# Altium PCB JHPowerBoardPCBpart2.PcbDoc
Units mm, origin at the board's own origin, x right, y up, seen from the top; angles counter-clockwise.
Board outline 95 x 90 mm, 2 copper layers (Top Layer, Bottom Layer); 10 components, 8 nets, 147 pads, 11 vias.
Unrouted connection lines stored in the file: 3.
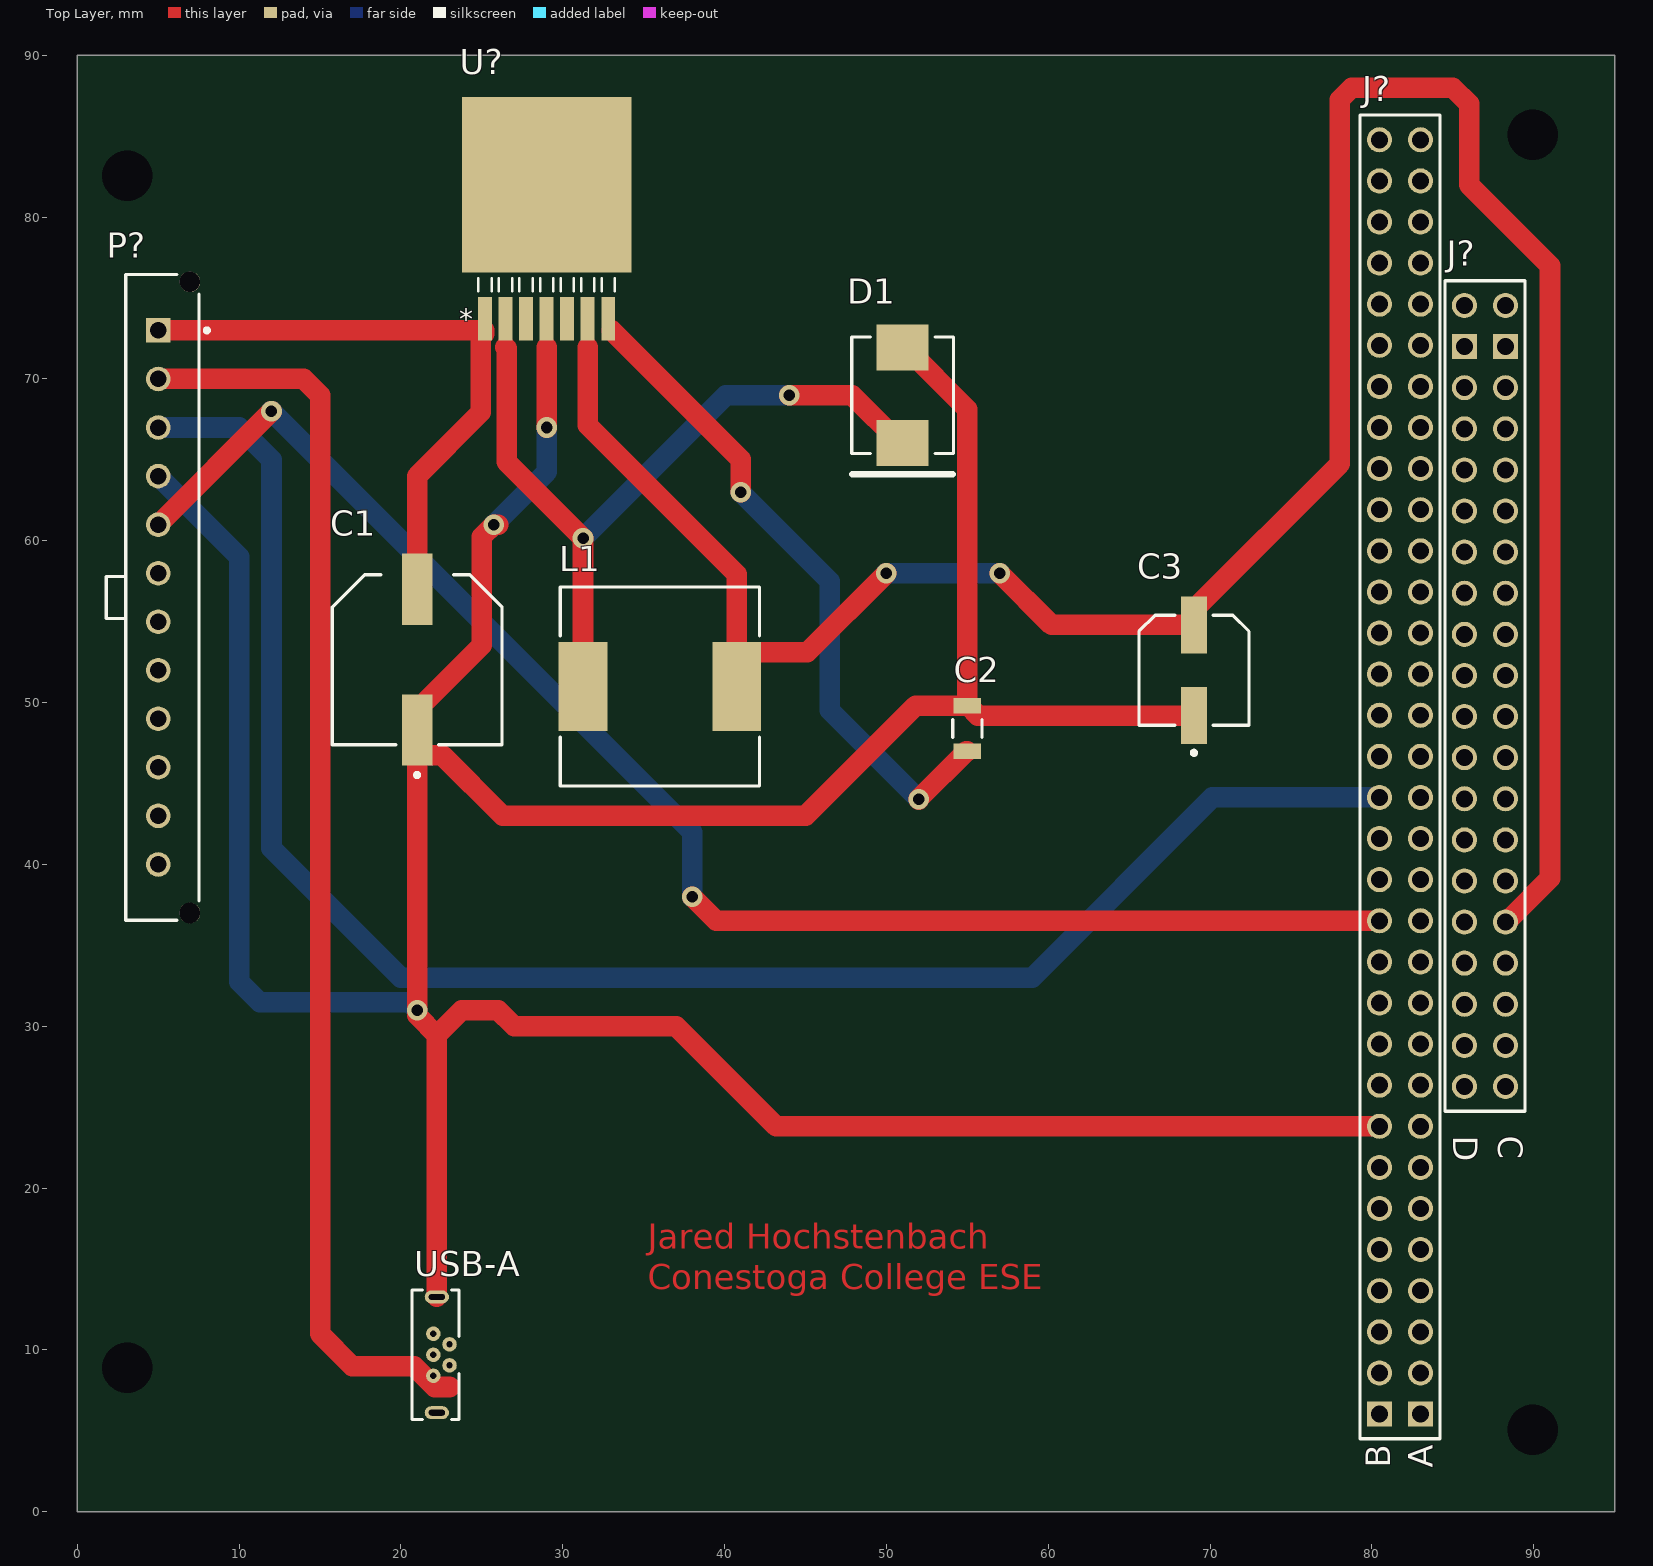
[diagram p0: Top Layer view]
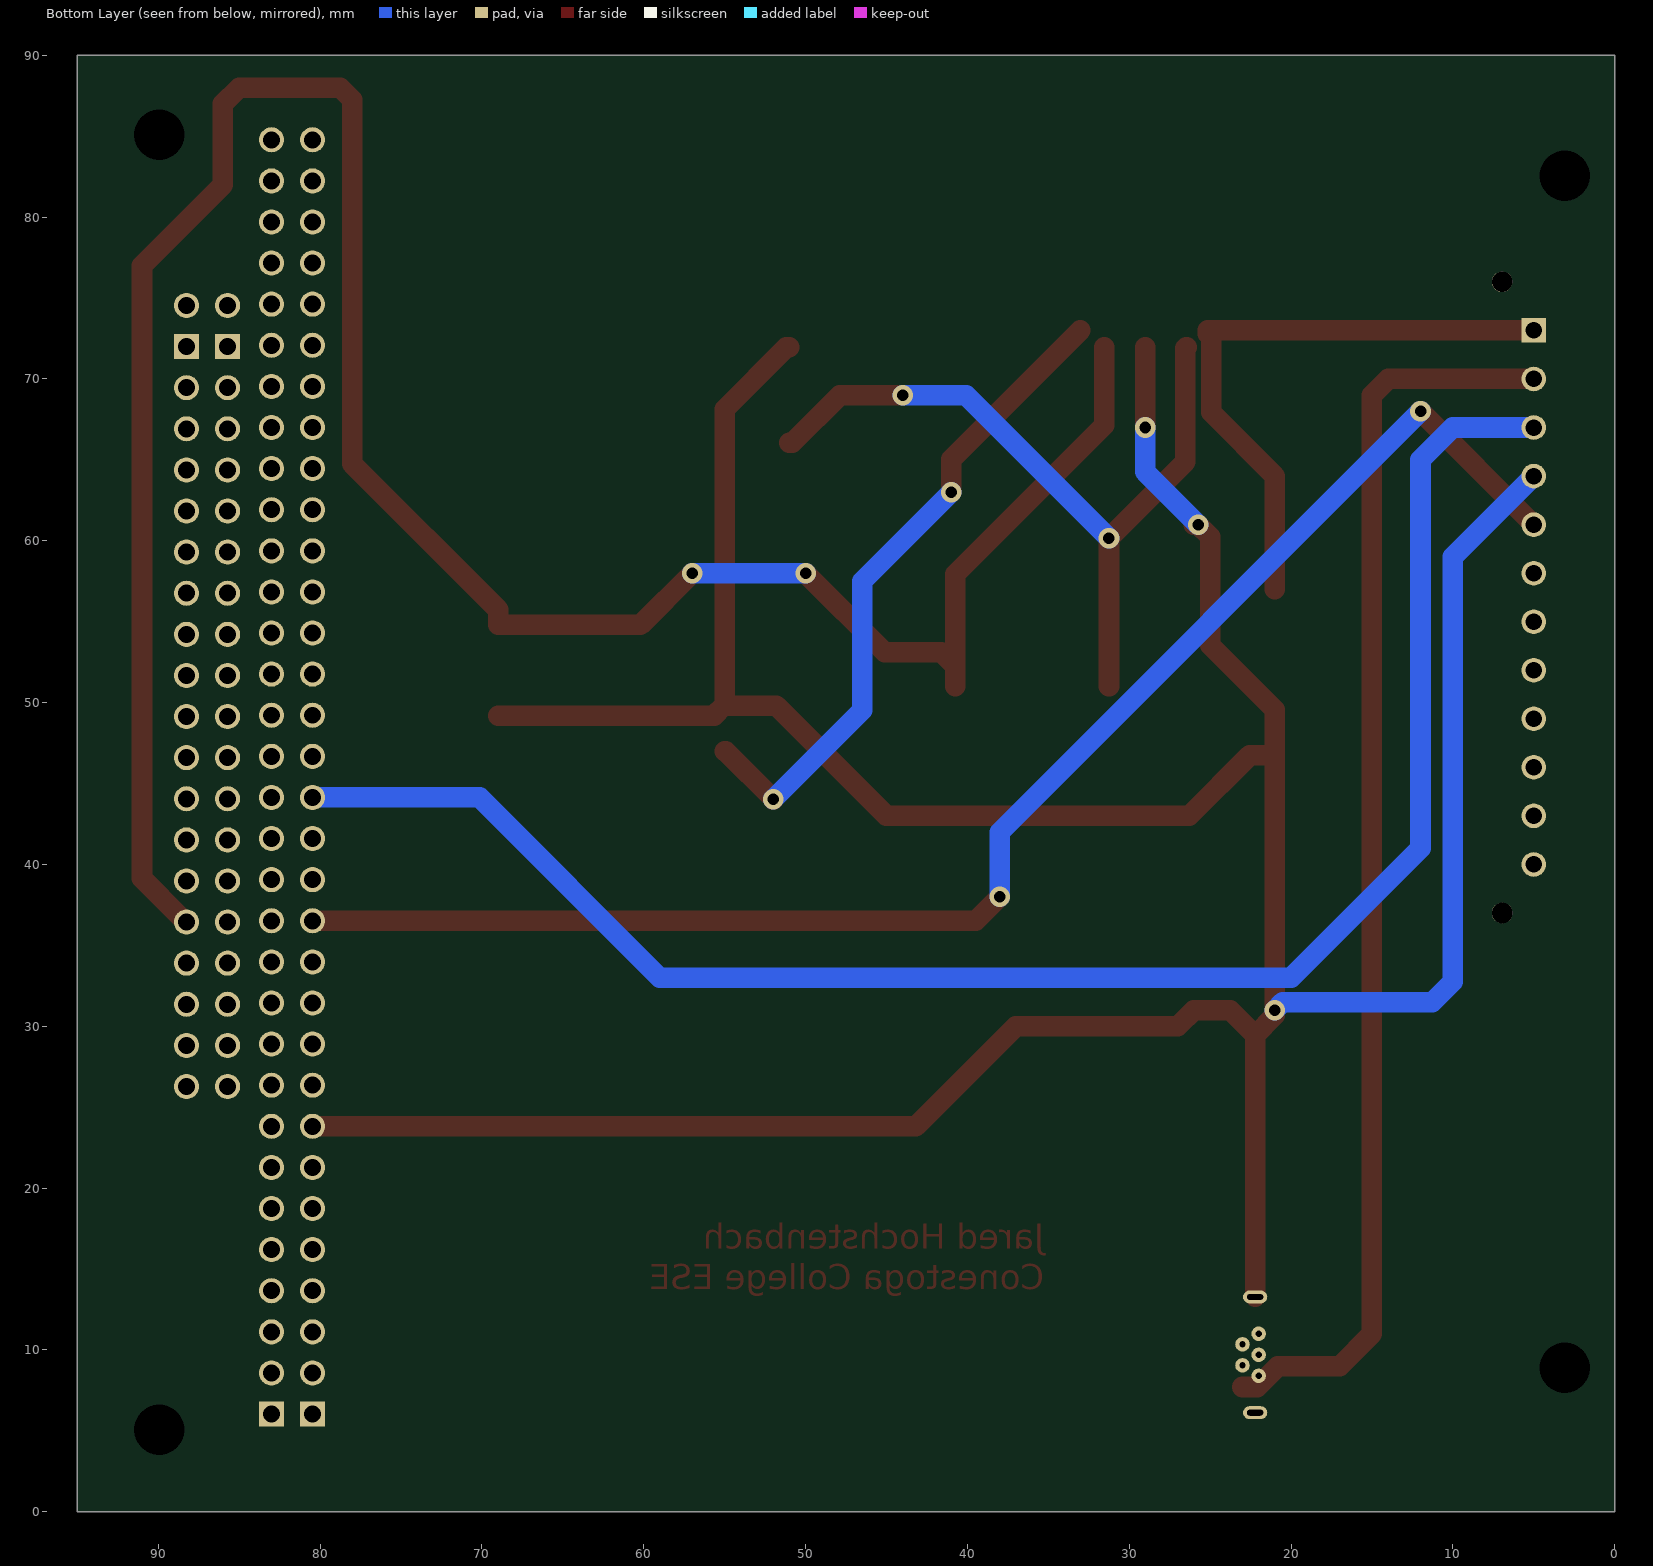
[diagram p1: Bottom Layer view, seen from below]
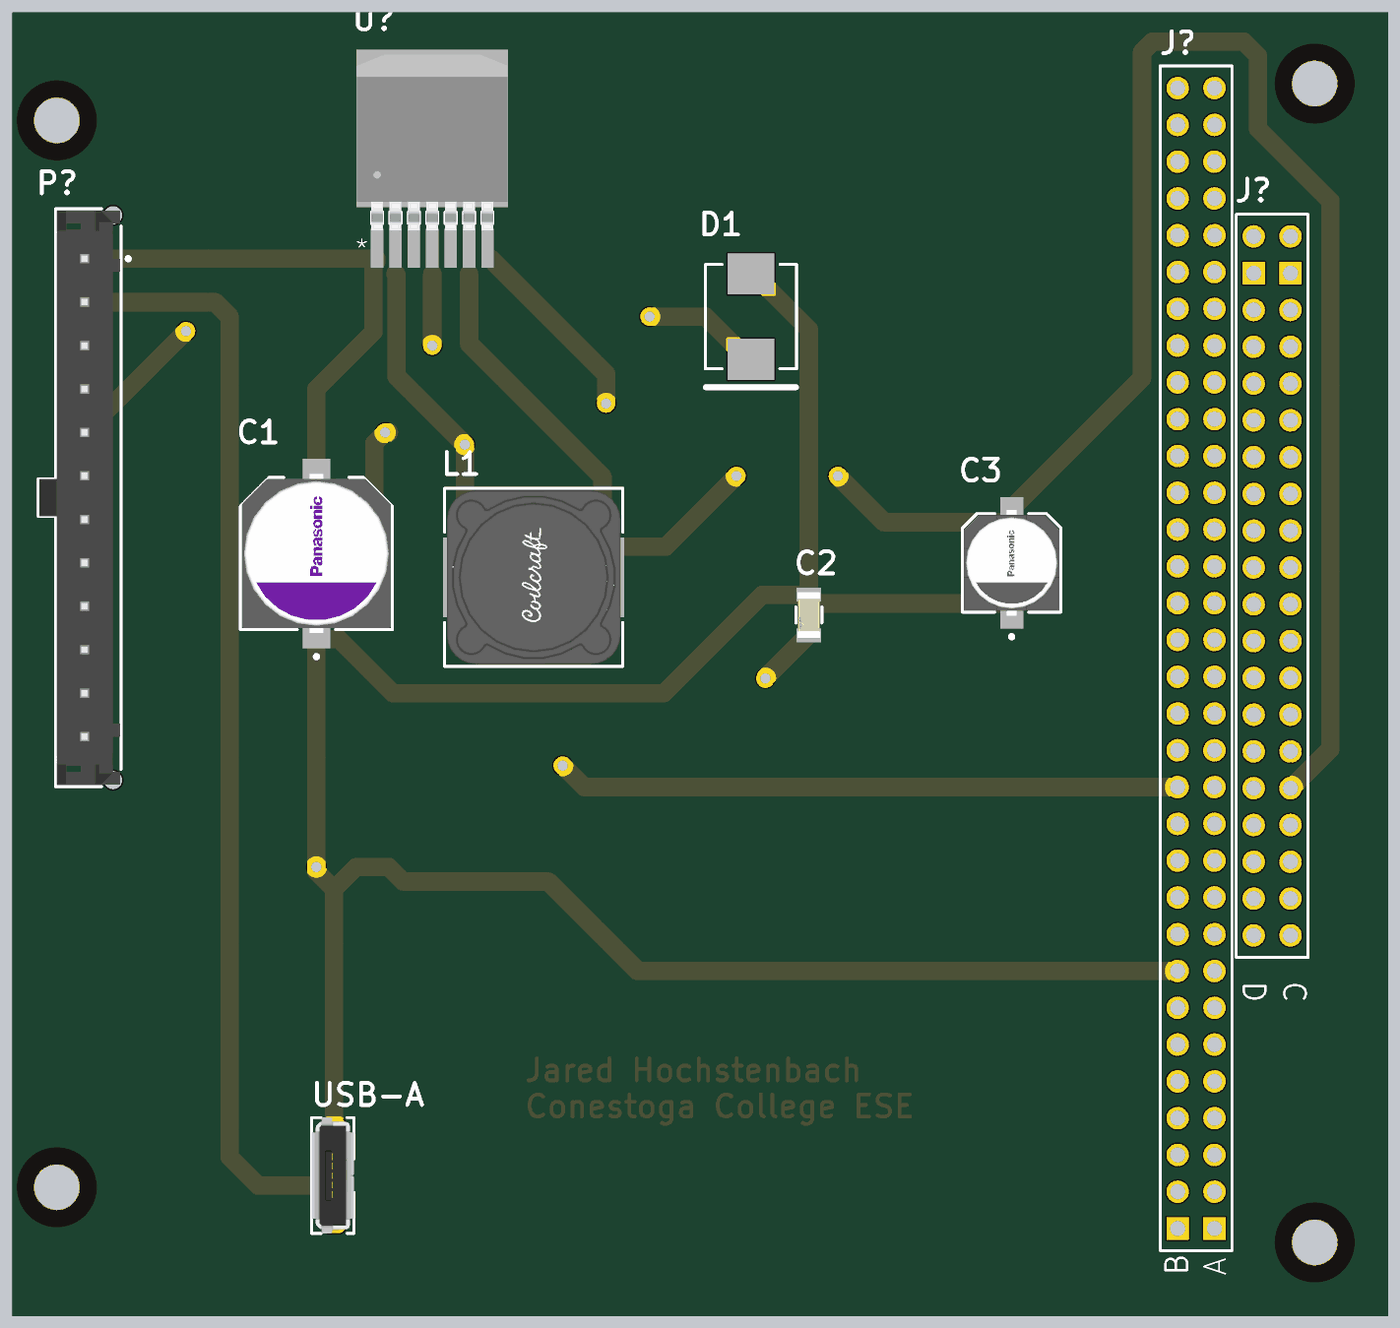
[diagram p2: 3D render of the assembled board from above, using the file's embedded part models]

## Layer stack, top to bottom
Top Solder: solder mask 0.0102, Solder Resist, Dk 3.5
Top Layer: signal copper 0.0356
Dielectric 1: dielectric 0.32, FR-4, Dk 4.8
Bottom Layer: signal copper 0.0356
Bottom Solder: solder mask 0.0102, Solder Resist, Dk 3.5

## Board outline
0,0 95,0 95,90 0,90

## Design rules (kind name [scope] priority, off if disabled: settings)
Clearance [All] p1: gap=0.254 ignorepadtopadclearanceinfootprint=FALSE except(0: Arc-Hole Track-Hole SMDPad-Hole THPad-Hole Via-Hole Fill-Hole Poly-Hole Region-Hole Text-Hole)
PolygonConnect [All] p1: connectstyle=Relief reliefconductorwidth=0.254 reliefentries=4 polygonreliefangle="90 Angle" airgapwidth=0.254
RoomDefinition PowerBoardpart2 [InComponentClass('PowerBoardpart2')] p1: confinementstyle=ConfineIn formatcopy=TRUE lockcomponents=FALSE outline -0.54,-0.46 95,-0.46 95,90 -0.54,90
RoutingVias [All] p1: holewidth=0.711 width=1.27 viastyle="Through Hole" minholewidth=0.711 minwidth=1.27 maxholewidth=0.711 maxwidth=1.27
SolderMaskExpansion [All] p1: expansion=0.102 istentingtop=FALSE
Width [All] p1: maxlimit=1.4 minlimit=1 preferedwidth=1.27 minimp=50.000000 maximp=50.000000 favimp=50.000000
30 further rules are at their usual default settings.

## Classes and differential pairs
component class PowerBoardpart2: C1 C2 C3 D1 J? L1 P? U? USB-A

## Components (designator, comment, footprint, x,y, rotation, side; value= is the part's Value field where it differs from the comment)
C1 "50SVPF68M" FP-OS-CON-SMT-F12-MFG 21,52.65 r90 top
C2 "C1206C821K5GACTU" FP-C1206C-EB-MFG 55,48.4 r90 top value="820 pF"
C3 "6SVPC330M" FP-OS-CON-SMT-C6-MFG 69,52 r90 top
D1 "B560C-13-F" DIOD-B5X0C-2_M 51,69 r90 top (schematic designator D?)
J? "PC104-CN-2P-F-R64" BTB2-54-V64F-04 83,6.04 r90 top
J? "PC104-CN-2P-F-R40-NS" BTB2-54-V40F-03 88.25,72 r270 top
L1 "MSS1210-333MEB" FP-MSS1210-333MEB-MFG 36,51 r0 top
P? "66201211122" 66201211122 5.255,56.5 r90 top
U? "LM2599SX-3.3/NOPB" TS7B 29,82 r0 top
USB-A "614105150621" 614105150621 22.22,9.7 r90 top

## Footprints (in the part's own frame and the unit in brackets; to place one, negate y for a bottom-side part, rotate by r counter-clockwise, add the part's x,y. Pads: shape width x height; smd on the part's side, far side on the other; paste and mask are expansions set on the pad)
66201211122 [mm] "3.00mm Male Single Row Vertical Header, 12p"
  rect 1.52x1.52 hole 1.02: 1(16.5,0.255)
  round 1.52 hole 1.02: 2(13.5,0.255) 3(10.5,0.255) 4(7.5,0.255) 5(4.5,0.255) 6(1.5,0.255) 7(-1.5,0.255) 8(-4.5,0.255) 9(-7.5,0.255) 10(-10.5,0.255) 11(-13.5,0.255) 12(-16.5,0.255)
  round 1.27 hole 1.27 unplated: MH1(-19.5,-1.705) MH2(19.5,-1.705)
  silkscreen extent -19.95,-2.88 19.95,3.46, body extent -19.82,-2.19 19.83,3.38, height 9.93
614105150621 [mm] "Micro USB 2.0 Type AB Vertical 5 Contacts"
  round 0.9 hole 0.4: 1(-1.3,0.22) 2(-0.65,-0.78) 3(0,0.22) 4(0.65,-0.78) 5(1.3,0.22)
  oval 0.8x1.5 hole 0.35 slot 1 at 90 deg: Shell(-3.575,0) Shell(3.575,0)
  silkscreen extent -4,-1.36 4,1.54, body extent -4,-1.36 4,1.54, height 5.66
BTB2-54-V40F-03 [mm] "Board-to-Board Connector, PC104 CD ISA, Vertical, 2-Row, 40-Postion, Pitch 2.54mm, Receptacle"
  round 1.55 hole 1.05: C0(-2.54,0) C2(2.54,0) C3(5.08,0) C4(7.62,0) C5(10.16,0) C6(12.7,0) C7(15.24,0) C8(17.78,0) C9(20.32,0) C10(22.86,0) C11(25.4,0) C12(27.94,0) C13(30.48,0) C14(33.02,0) C15(35.56,0) C16(38.1,0) C17(40.64,0) C18(43.18,0) C19(45.72,0) D0(-2.54,-2.54) D2(2.54,-2.54) D3(5.08,-2.54) D4(7.62,-2.54) D5(10.16,-2.54) D6(12.7,-2.54) D7(15.24,-2.54) D8(17.78,-2.54) D9(20.32,-2.54) D10(22.86,-2.54) D11(25.4,-2.54) D12(27.94,-2.54) D13(30.48,-2.54) D14(33.02,-2.54) D15(35.56,-2.54) D16(38.1,-2.54) D17(40.64,-2.54) D18(43.18,-2.54) D19(45.72,-2.54)
  rect 1.55x1.55 hole 1.05: C1(0,0) D1(0,-2.54)
  silkscreen extent -4.07,-3.74 47.24,1.21, body extent -4.14,-3.74 47.32,1.21, height 11.05
BTB2-54-V64F-04 [mm] "Board-to-Board Connector, PC104 BA ISA, Stackthrough, Vertical, 2-Row, 64-Postion, Pitch 2.54mm,  Receptacle , Height 11.05mm"
  rect 1.55x1.55 hole 1.05: A1(0,0) B1(0,2.54)
  round 1.55 hole 1.05: A2(2.54,0) A3(5.08,0) A4(7.62,0) A5(10.16,0) A6(12.7,0) A7(15.24,0) A8(17.78,0) A9(20.32,0) A10(22.86,0) A11(25.4,0) A12(27.94,0) A13(30.48,0) A14(33.02,0) A15(35.56,0) A16(38.1,0) A17(40.64,0) A18(43.18,0) A19(45.72,0) A20(48.26,0) A21(50.8,0) A22(53.34,0) A23(55.88,0) A24(58.42,0) A25(60.96,0) A26(63.5,0) A27(66.04,0) A28(68.58,0) A29(71.12,0) A30(73.66,0) A31(76.2,0) A32(78.74,0) B2(2.54,2.54) B3(5.08,2.54) B4(7.62,2.54) B5(10.16,2.54) B6(12.7,2.54) B7(15.24,2.54) B8(17.78,2.54) B9(20.32,2.54) B10(22.86,2.54) B11(25.4,2.54) B12(27.94,2.54) B13(30.48,2.54) B14(33.02,2.54) B15(35.56,2.54) B16(38.1,2.54) B17(40.64,2.54) B18(43.18,2.54) B19(45.72,2.54) B20(48.26,2.54) B21(50.8,2.54) B22(53.34,2.54) B23(55.88,2.54) B24(58.42,2.54) B25(60.96,2.54) B26(63.5,2.54) B27(66.04,2.54) B28(68.58,2.54) B29(71.12,2.54) B30(73.66,2.54) B31(76.2,2.54) B32(78.74,2.54)
  silkscreen extent -1.52,-1.2 80.27,3.75, body extent -1.6,-1.2 80.34,3.75, height 11.05
DIOD-B5X0C-2_M [mm] "Molded Diode, 2-Leads, Body 7.11x6.22mm, IPC Low Density"
  rect 2.85x3.2 smd: 1(-2.95,0) 2(2.95,0)
  silkscreen extent -4.87,-3.15 3.6,3.15, body extent -3.56,-3.11 3.55,3.11, height 2.63
FP-C1206C-EB-MFG [mm]
  rect 0.95x1.7 smd paste+0 mask+0: 1(-1.4,0) 2(1.4,0)
  silkscreen extent -0.55,-0.9 0.55,0.9, body extent -2,-1 2,1, height 0.25
FP-MSS1210-333MEB-MFG [mm]
  rect 3x5.5 smd paste+0 mask+0: 1(-4.75,0) 2(4.75,0)
  silkscreen extent -6.15,-6.15 6.15,6.15, body extent -6.35,-6.25 6.35,6.25, height 0.25
FP-OS-CON-SMT-C6-MFG [mm]
  rect 3.5x1.6 smd paste+0 mask+0: 1(-2.8,0) 2(2.8,0)
  silkscreen extent -5.22,-3.4 3.4,3.4, body extent -4.8,-3.65 4.8,3.65, height 0.25
FP-OS-CON-SMT-F12-MFG [mm]
  rect 4.4x1.9 smd paste+0 mask+0: 1(-4.35,0) 2(4.35,0)
  silkscreen extent -7.25,-5.25 5.25,5.25, body extent -6.8,-5.5 6.8,5.5, height 0.25
TS7B [mil]
  rect 33.97x105.56 smd paste+0 mask+0: 1(-150,-326) 2(-100,-326) 3(-50,-326) 4(0,-326) 5(50,-326) 6(100,-326) 7(150,-326)
  rect 412x428 smd paste+0 mask+0: 8(0,0)
  silkscreen extent -166,-259 166,-227, body extent -205,-278 205,200, height 189

## Part data
C1: library part CMP-05428-000631-1, "Conductive Polymer Aluminum Solid Capacitors (OS-CON) 68uF ±20% 50V RADIAL SMT 10x12.6mm", Capacitance=68uF, Case/Package=Radial, ESR (Equivalent Series Resistance)=20mR, Leakage Current=680uA, Max Operating Temperature=105°C, Min Operating Temperature=-55°C, Package Quantity=400, Ripple Current=4.3A, Tolerance=20%, Voltage=50V, Construction=Cylindrical, Diameter=10mm, Dissipation Factor=12%, Height=12.6mm, Height - Seated (Max)=0.5inch, Lead Free="Lead Free", Length=12.6mm, Life (Hours)=5000Hour, Mount="Surface Mount", Number of Pins=12, Packaging="Tape and Reel", Polarity=Polar, REACH SVHC="No SVHC", Ripple Current (AC)=4.3A, RoHS Compliant=Yes, Series="OS-CON™, SVPF", Termination=SMD/SMT, Voltage Rating=50V, Voltage Rating (DC)=50V
C2: library part CMP-03020-020553-1, "CAP CER 820PF 50V C0G/NP0 1206", Capacitance="820 pF", Manufacturer=KEMET, Package=C1206C-EB, Temperature="-55°C to +150°C", Temperature Characteristic=C0G, Temperature Coefficient=15%, Temperature Range High=+150°C, Temperature Range Low=-55°C, Tolerance=0.1, Voltage Rating="50 V", Automotive=Yes, Automotive Grade="Grade 0", Category=Cap, ComponentLink2Description=Datasheet, ComponentLink2URL=https://content.kemet.com/datasheets/KEM_C1007_X8R_ULTRA_150C_SMD.pdf, Device Class L1="Passive Components", Device Class L2=Capacitors, Device Class L3="Ceramic Capacitors", Digikey Description="CAP CER 820PF 50V C0G/NP0 1206", Height=0.88mm, Ipc Land Pattern Name=CAPC320160X78, Lead Free=Yes, Manufacturer Part Number=C1206C821K5GACTU, Material=Ceramic, Mouser Description="Multilayer Ceramic Capacitors MLCC - SMD/SMT 50volts 820pF C0G 10%", Octopart=https://octopart.com/c1206c821k5gactu-kemet-125661, RoHS=TRUE
C3: library part CMP-05428-000913-1, "Conductive Polymer Aluminum Solid Capacitors (OS-CON) 330uF ±20% 6.3V", Capacitance=330uF, Case/Package=Radial, ESR (Equivalent Series Resistance)=17mR, Leakage Current=415uA, Max Operating Temperature=105°C, Min Operating Temperature=-55°C, Package Quantity=1000, Ripple Current=3.39A, Tolerance=20%, Voltage=6.3V, Construction=Cylindrical, Diameter=6.3mm, Dissipation Factor=12%, Height=5.9mm, Height - Seated (Max)=0.236inch, Lead Free="Lead Free", Length=5.9mm, Life (Hours)=2000Hour, Mount="Surface Mount", Number of Pins=6, Packaging="Tape and Reel", Polarity=Polar, Radiation Hardening=No, REACH SVHC="No SVHC", Ripple Current (AC)=3.39A, RoHS Compliant=Yes, Series="OS-CON™, SVPC", Termination=SMD/SMT, Voltage Rating=6.3V, Voltage Rating (DC)=6.3V
D1: library part CMP-2000-05098-2, "Schottky Barrier Rectifier, 5 A, 60 V, -55 to 125 degC, 2-Pin SMD, RoHS, Tape and Reel", If - Forward Current=5A, Ifsm - Forward Surge Current=100A, Ir - Reverse Current=500uA, Manufacturer=DiodesIncorporated, Maximum Operating Temperature=+125C, Minimum Operating Temperature=-55C, Operating Temperature Range=-55Cto+125C, Package / Case=SMC, Vf - Forward Voltage=0.7V, Vrrm - Repetitive Reverse Voltage=60V, Brand=DiodesIncorporated, Configuration=Single, Datasheet URL=https://datasheet.ciiva.com/27052/1538961-27052355.pdf, Datasheet Version="Rev. 7-2, 06/2007", Factory Pack Quantity=3000, Height=2.5mm, Length=7.11mm, Manufacturer URL=http://www.diodes.com/, Mounting Style=SMD/SMT, Packaging=Reel, Product=SchottkyDiodes, Product Category=SchottkyDiodes&Rectifiers, RoHS=True, Series=B560, Technology=Si, Termination Style=SMD/SMT, Type=SchottkyBarrierRectifier, Unit Weight=0.007408oz, Width=6.22mm
J?: library part CMP-0001-00110-1, "Board-to-Board Connector, PC104 BA ISA, Stackthrough, Vertical, 2-Row, 64-Postion, Pitch 2.54mm,  Receptacle, Height 11.05mm", Package Reference=BTB2-54-V64F-04, ClassName="Board Template Connector", Mating Connector="Harwin-M20-6103205 (stackthrough)", Publisher=Altium
J?: library part CMP-0001-00108-1, "Board-to-Board Connector,  PC104 CD ISA, Vertical, 2-Row, 40-Postion, Pitch 2.54mm, Receptacle", Package Reference=BTB2-54-V40F-03, ClassName="Board Template Connector", Mating Connector="Harwin-M20-6112005 (Non-stackthrough)", Publisher=Altium
L1: library part CMP-11268-000051-1, "Fixed Inductor MSS1210 AEC-Q200 33 uH 20 % 5.9 A", DC Resistance (DCR)=39mR, Inductance=33uH, Inductance Tolerance=20%, Max DC Current=5.9A, Max Operating Temperature=85°C, Min Operating Temperature=-40°C, Package Quantity=25, Saturation Current=5.4A, Self Resonant Frequency=7.5MHz, Test Frequency=100kHz, Core Material=Ferrite, Height=10.2mm, Lead Free="Contains Lead", Length=12.3mm, Mount="Surface Mount", Packaging="Tape and Reel", REACH SVHC="No SVHC", RMS Current (Irms)=5.9A, Shielding=Shielded, Termination=SMD/SMT, Tolerance=20%, Width=12.3mm
P?: library part CMP-1502-00450-1, "THT Male Header WR-MPC3, Vertical, Single Row, pitch 3 mm, 12 pins", Contact Resistance=10mOhm, Manufacturer="Wurth Elektronik", Operating Temperature=-40to105degC, Working Voltage=250VAC, Datasheet URL=https://katalog.we-online.de/em/datasheet/6620xx11122.pdf, Gender=Male, Manufacturer URL=http://www.we-online.de, Mounting Technology=THT, Orientation=Vertical, Package Reference=66201211122, Packaging=Tube, Part Number=66201211122, Pin Number=12, Pitch=3mm, Publisher=WurthElektronik
U?: "No Description Available", Mfr_Name="Texas Instruments", Copyright="Copyright (C) 2023 Ultra Librarian. All rights reserved.", Manufacturer_Part_Number=LM2599SX-3.3/NOPB, RefDes=RefDes, Type=DEV
USB-A: library part CMP-1502-03251-1, "Micro USB 2.0 Type AB Receptacle WR-COM, Vertical, THT", Contact Resistance=30mOhm, Manufacturer="Wurth Elektronik", Operating Temperature=-40to85degC, Rated Current=1.8A, Working Voltage=30VAC, Connector Type=MicroUSB2.0TypeAB, Datasheet URL=https://katalog.we-online.de/em/datasheet/614105150621.pdf, Gender=Receptacle, Manufacturer URL=http://www.we-online.de, Mounting Technology=THT, Orientation=Vertical, Package Reference=614105150621, Packaging=TapeandReel, Part Number=614105150621, Publisher=WurthElektronik

## Free pads (board coordinates)
  round 1.524 hole 3.12 mask+2: 8(3.08,8.89) 9(89.92,5.08) 10(89.92,85.09) 11(3.08,82.55)

## Via types
v1: diameter 1.27, hole 0.711, Top Layer to Bottom Layer, 11 vias

## Nets (pads, with @x,y where several pads share a name; then routed paths per layer and width w, separated by ;. In a path a pad name is that pad's centre, name@x,y a point inside that pad or via, vN(x,y) a via of type N, cw(c..) or ccw(c..) an arc to the next point about the centre after c; other vN are vias at no path point)
GND: C1.1 C2.2 C3.1 D1.2 J?.B8 P?.4 U?.4 USB-A.5 USB-A.Shell | length 246.3
  Top Layer w1.27: USB-A.Shell@22.22,13.275 22.22,29.455 ; v1@26,61 v1(25.744,61) 25,60.256 25,53.55 21,49.55 C1.1 C1.1@21,47.05 ; v1(29,67) 29,71.96 ; D1.2 51.175,71.95 55,68.125 C2.2 ; C3.1 55.655,49.2 55.055,49.8 C2.2 ; J?.B8 43.18,23.82 37,30 27,30 26,31 23.765,31 22.22,29.455 ; C1.1@21,47.05 v1(21,31) 21,30.675 22.22,29.455 ; C1.1@21,47.05 21.315,46.735 22.565,46.735 26.3,43 45,43 51.8,49.8 C2.2
  Bottom Layer w1.27: P?.4 10,59 10,32.744 11.268,31.476 20.524,31.476 v1(21,31) ; v1(25.744,61) 29,64.256 v1(29,67)
NetC1_2: C1.2 P?.1 U?.1 | length 37.9
  Top Layer w1.27: P?.1 25.14,73 25.14,72.795 24.936,72.592 24.936,67.936 21,64 C1.2
NetC2_1: C2.1 U?.7 | length 41.1
  Top Layer w1.27: U?.7@33.014,73.014 41,65.028 v1(41,63) ; v1@52,44 v1(52,44.028) 52,44.055 54.945,47 C2.1
  Bottom Layer w1.27: v1(41,63) 46.5,57.5 46.5,49.528 v1(52,44.028)
NetC3_2: C3.2 J?.C15 L1.2 U?.6 | length 155
  Top Layer w1.27: 31.54,71.96 31.54,67.143 40.75,57.933 L1.2@40.75,52.25 ; L1.2 L1.2@40.75,52.25 ; v1(50,58) 45.115,53.115 41.615,53.115 L1.2@40.75,52.25 ; v1(57,58) 60.2,54.8 C3.2 69,55.75 78,64.75 78,87.256 78.744,88 85,88 86,87 86,82 91,77 91,39.14 J?.C15@88.54,36.68
  Bottom Layer w1.27: v1(50,58) v1(57,58)
NetD?_1: D1.1 L1.1 U?.2 | length 47.6
  Top Layer w1.27: 26.46,71.96 26.524,71.896 26.524,64.892 v1(31.25,60.166) L1.1 ; v1(44,69) 47.875,69 50.825,66.05 D1.1
  Bottom Layer w1.27: v1(31.25,60.166) 40.084,69 v1(44,69)
NetJ?_B5: J?.B5 J?.B16 P?.3 | length 108.2
  Bottom Layer w1.27: P?.3 10,67 12,65 12,41 20,33 59,33 70.14,44.14 J?.B16
NetJ?_B13: J?.B13 P?.5 | length 93.7
  Top Layer w1.27: P?.5 v1(12,68) ; v1(38,38) 39.48,36.52 J?.B13
  Bottom Layer w1.27: v1(12,68) 38,42 v1(38,38)
NetP?_2: P?.2 USB-A.1 | length 77.8
  Top Layer w1.27: P?.2 14,70 15,69 15,11 17,9 20.806,9 22.095,7.711 23,7.711
pads on no net: J?.A1 J?.A2 J?.A3 J?.A4 J?.A5 J?.A6 J?.A7 J?.A8 J?.A9 J?.A10 J?.A11 J?.A12 J?.A13 J?.A14 J?.A15 J?.A16 J?.A17 J?.A18 J?.A19 J?.A20 J?.A21 J?.A22 J?.A23 J?.A24 J?.A25 J?.A26 J?.A27 J?.A28 J?.A29 J?.A30 J?.A31 J?.A32 J?.B1 J?.B2 J?.B3 J?.B4 J?.B6 J?.B7 J?.B9 J?.B10 J?.B11 J?.B12 J?.B14 J?.B15 J?.B17 J?.B18 J?.B19 J?.B20 J?.B21 J?.B22 J?.B23 J?.B24 J?.B25 J?.B26 J?.B27 J?.B28 J?.B29 J?.B30 J?.B31 J?.B32 J?.C0 J?.C1 J?.C2 J?.C3 J?.C4 J?.C5 J?.C6 J?.C7 J?.C8 J?.C9 J?.C10 J?.C11 J?.C12 J?.C13 J?.C14 J?.C16 J?.C17 J?.C18 J?.C19 J?.D0 J?.D1 J?.D2 J?.D3 J?.D4 J?.D5 J?.D6 J?.D7 J?.D8 J?.D9 J?.D10 J?.D11 J?.D12 J?.D13 J?.D14 J?.D15 J?.D16 J?.D17 J?.D18 J?.D19 P?.6 P?.7 P?.8 P?.9 P?.10 P?.11 P?.12 P?.MH1 P?.MH2 U?.3 U?.5 U?.8 USB-A.2 USB-A.3 USB-A.4

## Other copper
Top Layer:
  text "Jared Hochstenbach" at 35.254,16.254 h1.52
  text "Conestoga College ESE" at 35.254,13.762 h1.52

## Text inside footprints (layer, text, board x,y; h text height)
J?: Top Overlay "D" at 85.013,23.233 h1.5 r270; Top Overlay "C" at 87.807,23.233 h1.5 r270
J?: Top Overlay "B" at 81.118,2.708 h1.5 r90; Top Overlay "A" at 83.753,2.708 h1.5 r90
U?: Top 3D Body "*" at 24.873,76.539 h1.27; Top Overlay "*" at 23.603,73.085 h1.27